# Altium PCB 李卓俊(1).PcbDoc
Units mil, origin at the board's own origin, x right, y up, seen from the top; angles counter-clockwise.
Board outline 4195.03 x 3903.03 mil, 2 copper layers (Top Layer, Bottom Layer); 77 components, 59 nets, 335 pads, 191 vias.
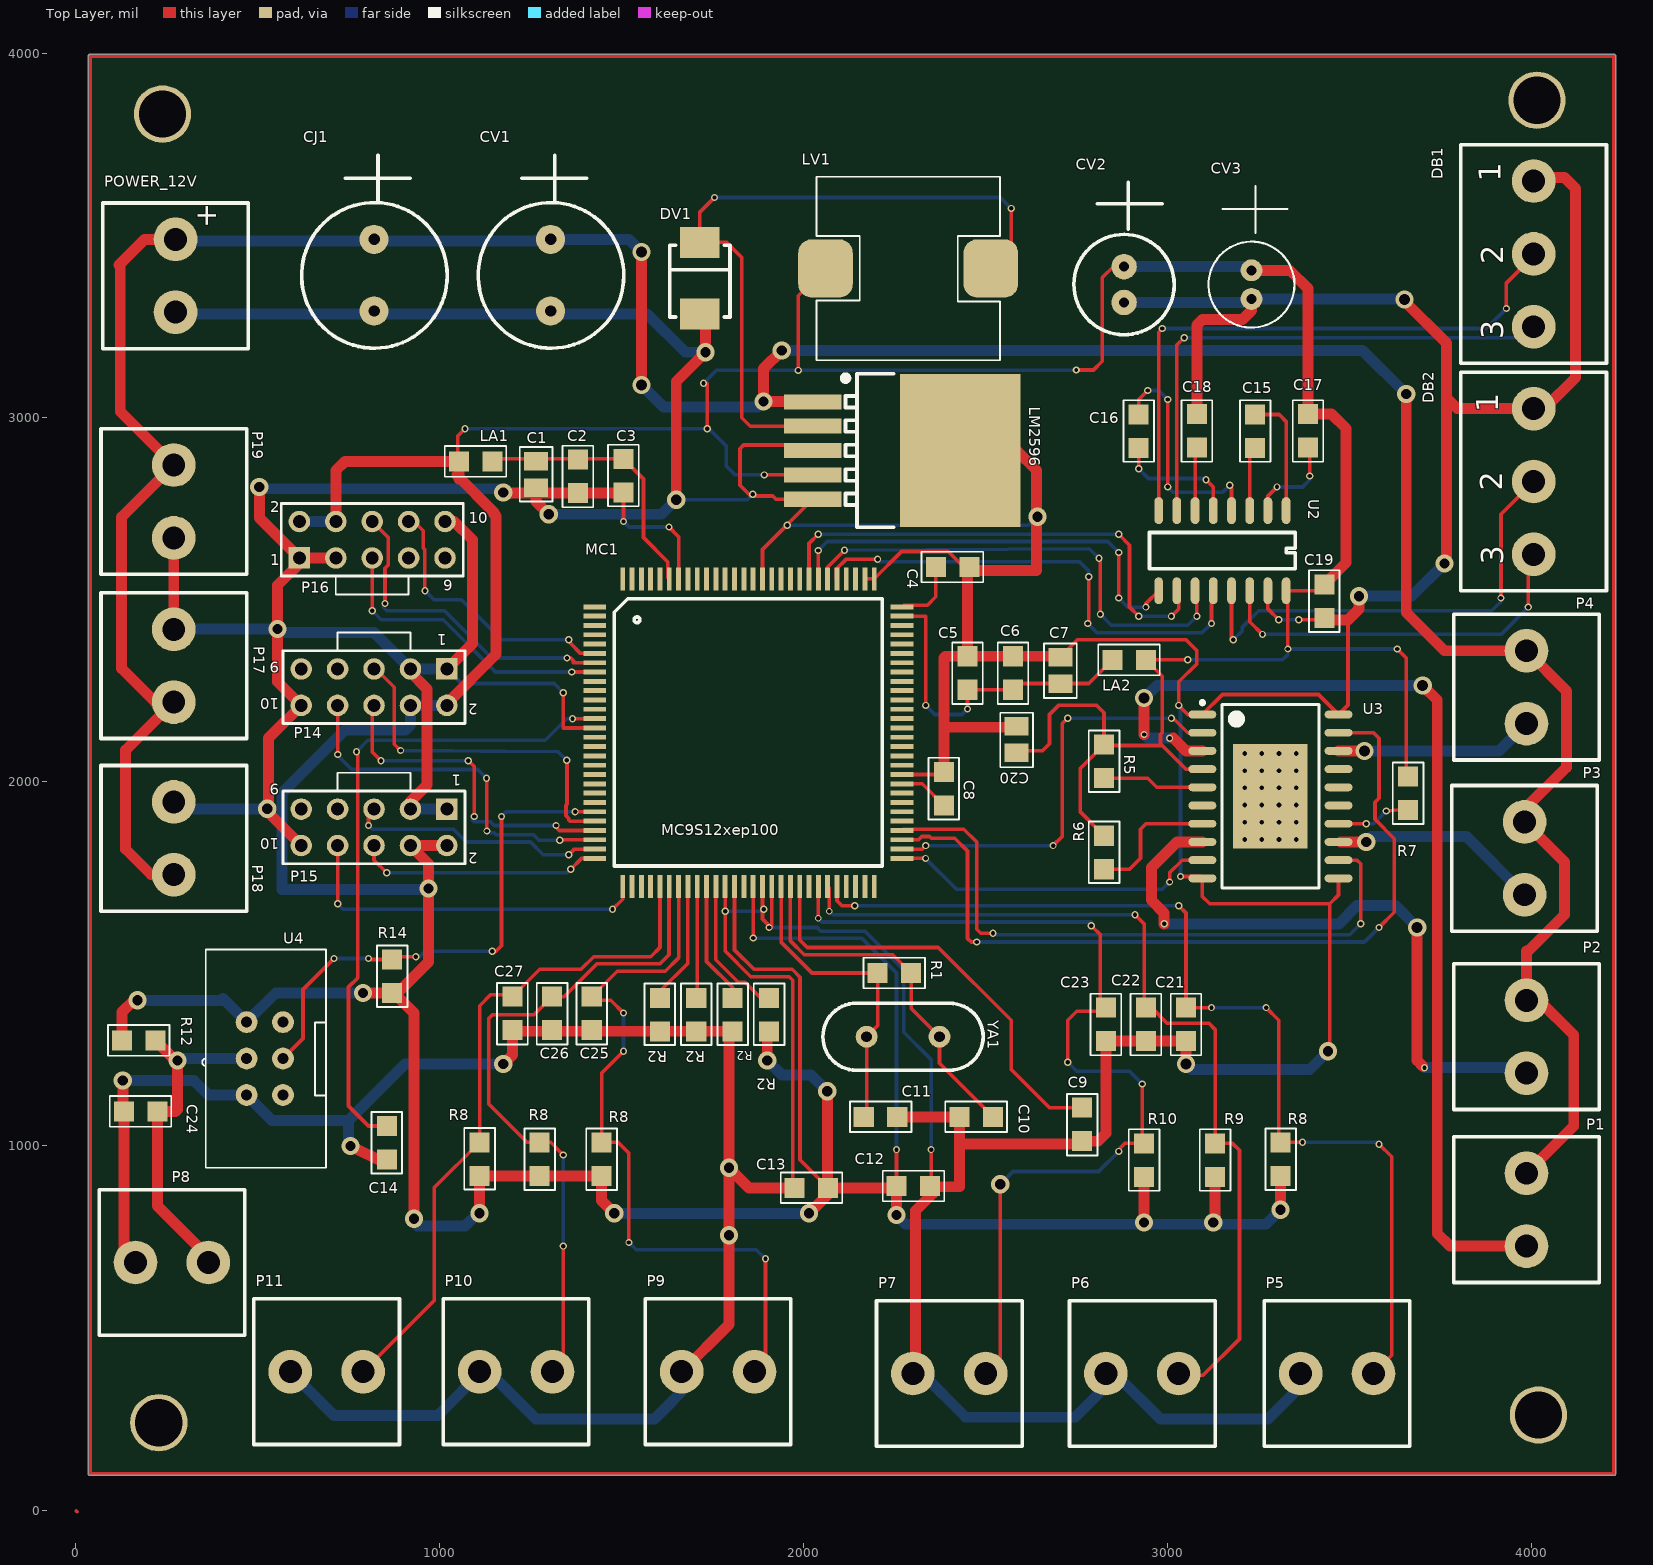
[diagram p0: Top Layer view]
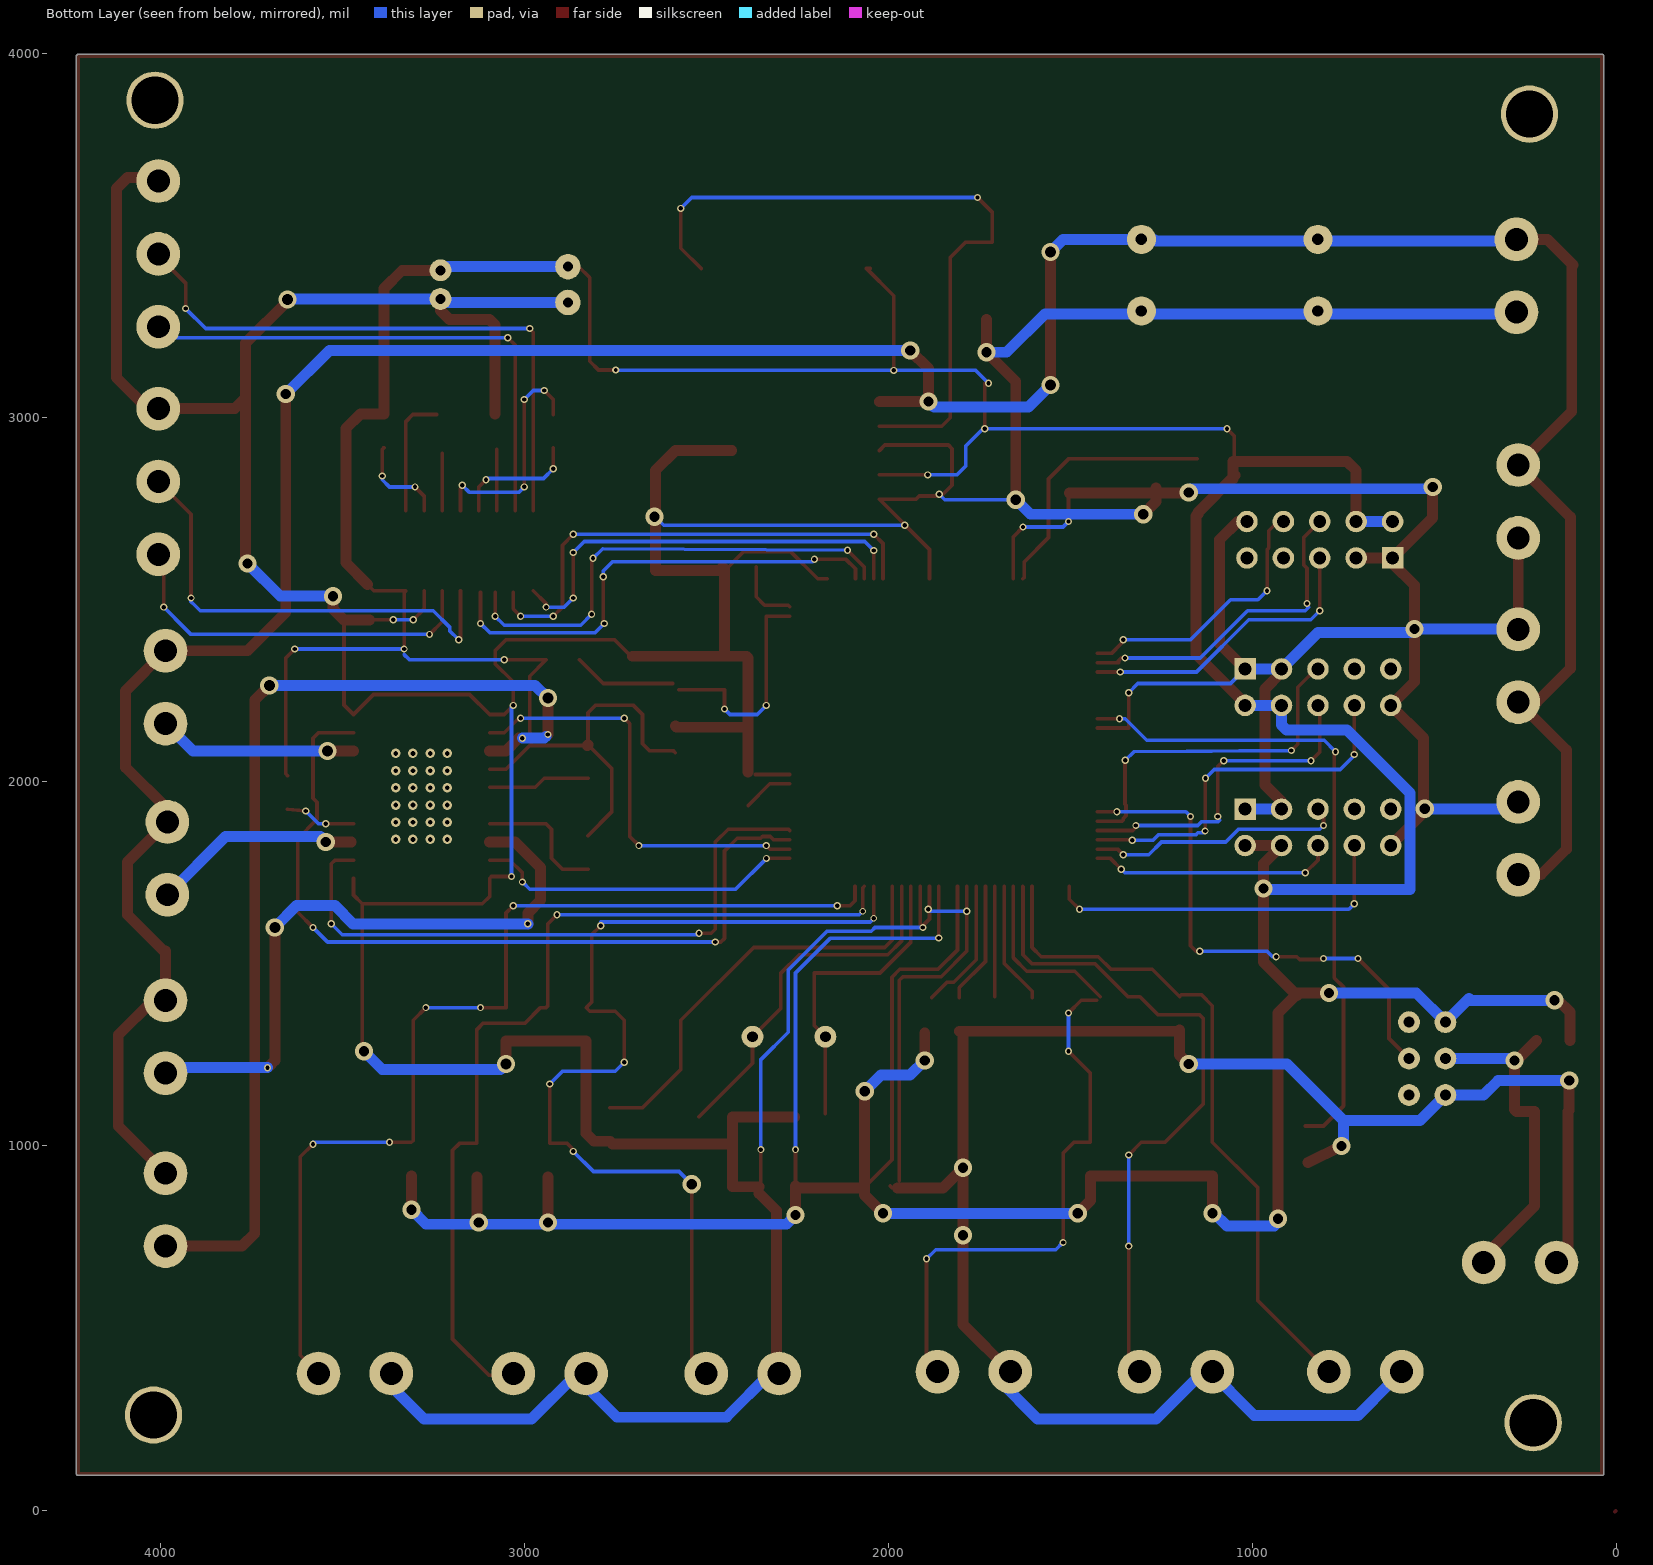
[diagram p1: Bottom Layer view, seen from below]

## Layer stack, top to bottom
Top Layer: signal copper 1.4
Dielectric: dielectric 12.6, FR-4, Dk 4.8
Bottom Layer: signal copper 1.4

## Board outline
34.98,100 ccw(c40,100) 40,94.98 4225,94.98 ccw(c4225,100) 4230.02,100 4230.02,3992 ccw(c4225,3992) 4229.99,3992.5 ccw(c4225,3993) 4230.02,3993 ccw(c4225,3993) 4225,3998.02 40,3998.02 ccw(c40,3993) 34.98,3993

## Design rules (kind name [scope] priority, off if disabled: settings)
Clearance [All] p1: gap=8
HoleSize [All] p1: absolutevalues=TRUE maxlimit=130 minlimit=1 maxpercent=80.000 minpercent=20.000
MinimumSolderMaskSliver [All] p1: minsoldermaskwidth=2
NetAntennae [All] p1: netantennaetolerance=8
PolygonConnect [All] p1: connectstyle=Relief reliefconductorwidth=10 reliefentries=4 polygonreliefangle="90 Angle"
RoutingVias [All] p1: holewidth=28 width=50 viastyle="Through Hole" minholewidth=28 minwidth=50 maxholewidth=28 maxwidth=50
ShortCircuit [All] p1: allowed=TRUE
SilkToSilkClearance [All] p1: silktosilkclearance=0
SilkscreenOverComponentPads [All] p1: minsilkscreentomaskgap=2
SolderMaskExpansion [All] p1: expansion=4
Width [All] p1: maxlimit=60 minlimit=10 preferedwidth=10
22 further rules are at their usual default settings.

## Classes and differential pairs
component class SHEET1-胡晓: C1 C2 C3 C4 C5 C6 C7 C8 C9 C10 C11 C12 C13 C14 C15 C16 C17 C18 C19 C20 C21 C22 C23 C24 C25 C26 C27 CJ1 CV1 CV2 CV3 DB1 DB2 DV1 LA1 LA2 LM2596 LV1 MC1 P1 P2 P3 P5 P6 P7 P8 P9 P10 P11 P14 P15 P16 P17 P18 P19 POWER_12V R1 R2 R5 R6 R7 R8 R9 R10 R12 R14 U2 U3 U4 YA1

## Components (designator, comment, footprint, x,y, rotation, side; value= is the part's Value field where it differs from the comment)
C1 "CA14" LC0805-有方向的电容 1265,2880 r270 top
C2 "CA13" 0805 1380,2885 r0 top
C3 "CA12" 0805 1505,2795 r180 top
C4 "CA11" 0805 2455,2590 r270 top
C5 "CA8" 0805 2450,2345 r0 top
C6 "CA9" 0805 2575,2345 r0 top
C7 "CA10" LC0805-有方向的电容 2705,2270 r90 top
C8 "CA7" 0805 2385,1935 r180 top
C9 "CA6" 0805 2765,1105 r0 top
C10 "CA5" 0805 2520,1080 r270 top
C11 "CA4" 0805 2165,1080 r90 top
C12 "CA3" 0805 2255,890 r90 top
C13 "CA2" 0805 1975,885 r90 top
C14 "CA1" 0805 855,1055 r0 top
C15 "104" 0805 3240,2917 r180 top
C16 "104" 0805 2920,2917 r180 top
C17 "104" 0805 3385,3010 r0 top
C18 "104" 0805 3080,3010 r0 top
C19 "104" 0805 3430,2450 r180 top
C20 "C20" LC0805-有方向的电容 2585,2080 r90 top
C21 "0.1uF" 0805 3050,1380 r0 top
C22 "0.1uF" 0805 2940,1380 r0 top
C23 "0.1uF" 0805 2830,1380 r0 top
C24 "Cap" 0805 225,1095 r270 top
C25 "0.1uF" 0805 1418,1410 r0 top
C26 "0.1uF" 0805 1309,1410 r0 top
C27 "0.1uF" 0805 1200,1410 r0 top
CJ1 "50V" 470uF 820,3490 r0 top
CV1 "Cap Pol1" 50V/330uF 1305,3490 r0 top
CV2 "Cap Pol1" 10V/330uF 2880,3415 r0 top
CV3 "Cap Pol1" 35V/10uF 3230,3405 r0 top
DB1 "DB1" kf128-3P 4005,3650 r270 top
DB2 "DB2" kf128-3P 4005,3025 r270 top
DV1 "Diode" SMB-二极管 1720,3480 r270 top
LA1 "LA2" 0805 1145,2880 r270 top
LA2 "LA1" 0805 2940,2335 r270 top
LM2596 "LM2596_5" LM2596 2430,2910 r180 top
LV1 "Inductor" 47uH 2060,3410 r0 top
MC1 "UA1" mc9s12xep100 1840,2145 r0 top
P1 "LED1" KF128-2p 3985,925 r270 top
P2 "LED2" KF128-2p 3985,1400 r270 top
P3 "LED3" KF128-2p 3980,1890 r270 top
P4 "蜂鸣器" KF128-2p 3985,2360 r270 top
P5 "按键" KF128-2p 3365,375 r0 top
P6 "按键" KF128-2p 2830,375 r0 top
P7 "按键" KF128-2p 2300,375 r0 top
P8 "复位开关" KF128-2p 365,680 r180 top
P9 "中断" KF128-2p 1665,380 r0 top
P10 "中断" KF128-2p 1110,380 r0 top
P11 "中断" KF128-2p 590,380 r0 top
P14 "Header 5X2" 插针5x5 1020,2310 r270 top
P15 "Header 5X2" 插针5x5 1020,1925 r270 top
P16 "Header 5X2" 插针5x5 615.01,2615 r90 top
P17 "12V供电" KF128-2p 270,2419 r270 top
P18 "12V供电" KF128-2p 270,1945 r270 top
P19 "12V供电" KF128-2p 270,2670 r90 top
POWER_12V "Header 2" KF128-2p 275,3290 r90 top
R1 "RA8" 0805 2295,1475 r270 top
R2 "RA2" 0805 1905,1315 r180 top
R2 "RA2" 0805 1705,1315 r180 top
R2 "RA2" 0805 1605,1315 r180 top
R2 "RA2" 0805 1805,1315 r180 top
R5 "10K" 0805 2825,2010 r180 top
R6 "10K" 0805 2825,1760 r180 top
R7 "10K" 0805 3660,2015 r0 top
R8 "10K" 0805 1110,918 r180 top
R8 "10K" 0805 1445,1010 r0 top
R8 "10K" 0805 3310,1010 r0 top
R8 "10K" 0805 1275,1010 r0 top
R9 "10K" 0805 3130,915 r180 top
R10 "10K" 0805 2935,915 r180 top
R12 "Res2" 0805 220,1290 r270 top
R14 "Res2" 0805 870,1420 r180 top
U2 "MAX3232C" MAX232 3325,2745 r0 top
U3 "TLE8104" TEL8104 3095,2185 r0 top
U4 "BDM" BDM 570,1140 r270 top
YA1 "YA1" XTAL 2145,1300 r0 top

## Footprints (in the part's own frame and the unit in brackets; to place one, negate y for a bottom-side part, rotate by r counter-clockwise, add the part's x,y. Pads: shape width x height; smd on the part's side, far side on the other; paste and mask are expansions set on the pad)
10V/330uF [mil]
  round 70 hole 27.56: 1(0,0) 2(0,-98.43)
  silkscreen extent -138,-187 138,231
35V/10uF [mil]
  round 60 hole 27.56: 1(0,0) 2(0,-78.74)
  silkscreen extent -118,-157 118,231
47uH [mil]
  rrect50% 150x160.48 smd mask+0: 0(0,0) 1(454.09,0)
  silkscreen extent -25,-252 479,252
50V/330uF [mil]
  round 80 hole 31.5: 1(0,0) 2(0,-196.85)
  silkscreen extent -199,-299 201,231
470uF [mil]
  round 80 hole 31.5: 1(0,0) 2(0,-196.85)
  silkscreen extent -199,-299 201,231
0805 [mil]
  rect 55x55 smd: 1(0,-92) 2(0,0)
  silkscreen extent -42,-131 42,38
BDM [mil]
  round 60 hole 30: 1(0,0) 2(0,-100) 3(-100,0) 4(-100,-100) 5(-200,0) 6(-200,-100)
  silkscreen extent -400,-222 200,118
KF128-2p [mil]
  round 120 hole 62.99: 1(0,0) 2(200,0)
  silkscreen extent -100,-200 300,200
kf128-3P [mil]
  round 120 hole 62.99: 0(400,0) 1(0,0) 2(200,0)
  silkscreen extent -100,-200 500,200
LC0805-有方向的电容 [mm]
  rect 1.287x1.673 smd: 1(0,0) 2(1.85,0)
  silkscreen extent -1.02,-1.14 2.79,1.14
LM2596 [mm]
  rect 4x1.05 smd: 1(10.3,-3.4) 2(10.3,-1.7) 3(10.3,0) 4(10.3,1.7) 5(10.3,3.4)
  rect 8.4x10.65 smd: 6(0,0)
  silkscreen extent 4.65,-5.35 8.2,5.35
MAX232 [mil]
  oval 24x74 smd: 1(0,0) 2(-50,0) 3(-100,0) 4(-150,0) 5(-200,0) 6(-250,0) 7(-300,0) 8(-350,0) 9(-350,-220) 10(-300,-220) 11(-250,-220) 12(-200,-220) 13(-150,-220) 14(-100,-220) 15(-50,-220) 16(0,-220)
  silkscreen extent -375,-160 25,-60
mc9s12xep100 [mm]
  rect 1.6x0.34 smd: 1(-10.511,8.528) 2(-10.511,7.878) 3(-10.511,7.228) 4(-10.511,6.578) 5(-10.511,5.928) 6(-10.511,5.278) 7(-10.511,4.628) 8(-10.511,3.978) 9(-10.511,3.328) 10(-10.511,2.678) 11(-10.511,2.028) 12(-10.511,1.378) 13(-10.511,0.728) 14(-10.511,0.078) 15(-10.511,-0.572) 16(-10.511,-1.222) 17(-10.511,-1.872) 18(-10.511,-2.522) 19(-10.511,-3.172) 20(-10.511,-3.822) 21(-10.511,-4.472) 22(-10.511,-5.122) 23(-10.511,-5.772) 24(-10.511,-6.422) 25(-10.511,-7.072) 26(-10.511,-7.722) 27(-10.511,-8.372) 28(-10.511,-9.022) 57(10.939,-9.022) 58(10.939,-8.372) 59(10.939,-7.722) 60(10.939,-7.072) 61(10.939,-6.422) 62(10.939,-5.772) 63(10.939,-5.122) 64(10.939,-4.472) 65(10.939,-3.822) 66(10.939,-3.172) 67(10.939,-2.522) 68(10.939,-1.872) 69(10.939,-1.222) 70(10.939,-0.572) 71(10.939,0.078) 72(10.939,0.728) 73(10.939,1.378) 74(10.939,2.028) 75(10.939,2.678) 76(10.939,3.328) 77(10.939,3.978) 78(10.939,4.628) 79(10.939,5.278) 80(10.939,5.928) 81(10.939,6.578) 82(10.939,7.228) 83(10.939,7.878) 84(10.939,8.528)
  rect 0.34x1.6 smd: 29(-8.561,-10.972) 30(-7.911,-10.972) 31(-7.261,-10.972) 32(-6.611,-10.972) 33(-5.961,-10.972) 34(-5.311,-10.972) 35(-4.661,-10.972) 36(-4.011,-10.972) 37(-3.361,-10.972) 38(-2.711,-10.972) 39(-2.061,-10.972) 40(-1.411,-10.972) 41(-0.761,-10.972) 42(-0.111,-10.972) 43(0.539,-10.972) 44(1.189,-10.972) 45(1.839,-10.972) 46(2.489,-10.972) 47(3.139,-10.972) 48(3.789,-10.972) 49(4.439,-10.972) 50(5.089,-10.972) 51(5.739,-10.972) 52(6.389,-10.972) 53(7.039,-10.972) 54(7.689,-10.972) 55(8.339,-10.972) 56(8.989,-10.972) 85(8.989,10.478) 86(8.339,10.478) 87(7.689,10.478) 88(7.039,10.478) 89(6.389,10.478) 90(5.739,10.478) 91(5.089,10.478) 92(4.439,10.478) 93(3.789,10.478) 94(3.139,10.478) 95(2.489,10.478) 96(1.839,10.478) 97(1.189,10.478) 98(0.539,10.478) 99(-0.111,10.478) 100(-0.761,10.478) 101(-1.411,10.478) 102(-2.061,10.478) 103(-2.711,10.478) 104(-3.361,10.478) 105(-4.011,10.478) 106(-4.661,10.478) 107(-5.311,10.478) 108(-5.961,10.478) 109(-6.611,10.478) 110(-7.261,10.478) 111(-7.911,10.478) 112(-8.561,10.478)
  silkscreen extent -9.14,-9.55 9.55,9.09
SMB-二极管 [mil]
  rect 85x107.99 smd: 1(195,-5) 2(-1.85,-5)
  silkscreen extent 6,-88 203,78
TEL8104 [mm]
  oval 1.95x0.55 smd: 1(0,0) 2(0,-1.27) 3(0,-2.54) 4(0,-3.81) 5(0,-5.08) 6(0,-6.35) 7(0,-7.62) 8(0,-8.89) 9(0,-10.16) 10(0,-11.43) 11(9.5,-11.43) 12(9.5,-10.16) 13(9.5,-8.89) 14(9.5,-7.62) 15(9.5,-6.35) 16(9.5,-5.08) 17(9.5,-3.81) 18(9.5,-2.54) 19(9.5,-1.27) 20(9.5,0)
  rect 5.2x7.3 smd: 21(4.75,-5.715)
  silkscreen extent -0.12,-12.11 8.13,0.95, body extent 0.95,-12.11 8.55,0.68, height 2.55
XTAL [mil]
  round 60 hole 30: 1(28,0) 2(228,0)
  silkscreen extent -92,-92 348,92
插针5x5 [mm]
  rect 1.5x1.5 hole 0.9: 1(0,0)
  round 1.5 hole 0.9: 2(2.54,0) 3(0,-2.54) 4(2.54,-2.54) 5(0,-5.08) 6(2.54,-5.08) 7(0,-7.62) 8(2.54,-7.62) 9(0,-10.16) 10(2.54,-10.16)
  silkscreen extent -2.54,-11.43 3.81,1.27

## Free pads (board coordinates)
  round 157.48 hole 129.92: 1(229,240) 1(239,3834) 1(4014,3872) 1(4018,261)

## Via types
v1: diameter 20, hole 12, Top Layer to Bottom Layer, 120 vias
v2: diameter 50, hole 28, Top Layer to Bottom Layer, 35 vias
v3: diameter 25.98, hole 12.99, Top Layer to Bottom Layer, tented top, 24 vias
v4: diameter 50, hole 30, Top Layer to Bottom Layer, 8 vias
v5: diameter 18, hole 12, Top Layer to Bottom Layer, 2 vias
v6: diameter 20, hole 10, Top Layer to Bottom Layer, 1 vias
v7: diameter 20, hole 12, Top Layer to Bottom Layer, tented top, 1 vias

## Nets (pads, with @x,y where several pads share a name; then routed paths per layer and width w, separated by ;. In a path a pad name is that pad's centre, name@x,y a point inside that pad or via, vN(x,y) a via of type N, cw(c..) or ccw(c..) an arc to the next point about the centre after c; other vN are vias at no path point)
5V: C12.2 C13.1 C17.2 C19.1 C20.1 CV2.1 CV3.1 LA1.1 LA2.2 LM2596.4 LV1.0 MC1.41 MC1.43 P14.2 P14.4 P15.2 P15.4 P16.2 P16.4 R2.2@1905,1315 R5.1 R6.1 R7.2 R8.1@1275,918 R8.1@1445,918 R8.1@3310,918 R8.2@1110,918 R9.2 R10.2 R12.1 R14.2 U2.16 U3.4 U4.6 | length 17574.9
  Top Layer w10: LA1.1@1050,2883 1050,2950 v1(1070,2970) ; v1(1735,2970) 1735,3095 ; MC1.41 1810.02,1538.26 1863.28,1485 1968.28,1485 1990,1463.28 1990,962 2065,887 C13.1 ; v1(1861.21,1571.21) MC1.43 ; v1(1891.93,2843.07) LM2596.4 ; R2.2@1900,1310 R2.2@1905,1315 ; v1(1985,3130) 1985,3335 LV1.0 LV1.0@2050,3410 ; C12.2 v1(2255,990) ; C20.1 2590,2085 2655,2085 2675,2105 2675,2185 2700,2210 2805,2210 2825,2190 R5.1 2760,2037 2760,1917 R6.1 ; v6(2749,3131) 2796,3131 2820,3155 2820,3385 2850,3415 CV2.1 ; R5.1@2827,2100 2985,2100 ; v1(3055,2335) LA2.2 2985,2290 2985,2135.36 2980,2130.36 2980,2105 2985,2100 ; U3.4 3050,2035 2985,2100 ; v1(3330,2365) 3330,2520 U2.16 3413,2525 C19.1 ; v1(3630,2365) 3655,2340 3655,2022 R7.2@3650,2017
  Top Layer w30: R12.1 128,1368 160,1400 v2(170,1400) ; P16.4 715.01,2855.01 740,2880 LA1.1 1053,2832 ; v2(790,1420) R14.2 875,1420 930,1365 v2(930,800) ; R14.2@877.25,1412.75 970,1505.5 970,1775 P15.4 P15.2 ; P15.4@911.06,1833.94 P15.4@920,1833.94 ; P14.2 1020,2215.59 1155,2350.59 1155,2730 1150,2735 1150,2740 1048,2842 ; v2(1110,815) 1110,918 1275,918 1445,918 1445,850 v2(1480,815) ; v2(1900,1235) R2.2@1900,1310 ; v2(2015,815) 2065,865 2065,887 v2(2065,1150) ; C13.1 C12.2@2250,885 ; v2(2255,810) C12.2 ; R5.1 R5.1@2827,2100 ; v2(2935,790) R10.2 ; v2(3125,790) 3130,795 R9.2 ; CV3.1 3335,3405 3385,3355 C17.2 3450,3010 3490,2970 3490,2602 C19.1 ; v2(3310,825) R8.1@3310,918
  Bottom Layer w10: v1(1070,2970) v1(1735,2970) 1740,2970 1786.93,2923.07 1786.93,2868.07 1811.93,2843.07 v1(1891.93,2843.07) ; v1(1725,3095) 1760,3130 v1(1985,3130) 2748,3130 v6(2749,3131) ; v1(1861.21,1571.21) 1862.41,1570 2160,1570 2255,1475 v1(2255,990) ; v1(3055,2335) 3315,2335 3330,2350 ; v1(3330,2365) v1(3630,2365)
  Bottom Layer w30: v2(170,1400) 405,1400 ; 405,1405 U4.6 550,1420 v2(790,1420) ; P16.2 P16.4 ; v2@930,790 940,780 1070,780 v2@1105,815 ; v2@970,1704.47 567.47,1704.47 567.47,1969.14 740.33,2142 906,2142 920,2156 P14.4 P14.2 ; v2(1480,815) v2(2015,815) ; v2(1900,1235) 1940,1195 2020,1195 v2(2065,1150) ; v2(2255,810) 2280,785 3270,785 v2(3310,825) ; CV2.1 CV3.1@3220,3415
  other v2: 970,1707
12V: CJ1.1 CV1.1 LM2596.1 P1.1 P2.1 P3.1 P4.1 P17.2 P18.2 P19.2 POWER_12V.2 | length 8990
  Top Layer w30: P18.2 208,1745 138,1815 138,2087 P17.2 219,2219 127,2311 127,2727 P19.2 123,3017 123,3417 120,3420 190,3490 POWER_12V.2 ; v4(1555,3090) v4(1555,3455) ; v2(1940,3185) 1890,3135 v2(1890,3045) 2023.35,3045 LM2596.1 ; v2(3655,3065) 3655,2465 3760,2360 P4.1 4095,2250 4095,2040 3980,1925 P3.1 4090,1780 4090,1635 3990,1535 3985,1535 P2.1 ; P1.1 4115,1055 4115,1305 P2.1@4020,1400
  Bottom Layer w30: POWER_12V.2@275,3485 1265,3485 1270,3490 1520,3490 v4(1555,3455) ; v4(1555,3090) 1615,3030 1875,3030 v2(1890,3045) ; v2(1940,3185) 3535,3185 v2(3655,3065)
BKGD: MC1.23 R14.1 U4.3 | length 1408.2
  Top Layer w10: U4.3 625,1295 625,1430 v1(710,1515) ; v1@812,1512 R14.1 878,1520 v1(935,1520) ; 1155,1535 1170,1550 v1(1170,1905) ; v1(1372.24,1917.76) MC1.23
  Bottom Layer w10: v1(710,1515) v1(805,1515) ; v1(935,1520) 945,1520 960,1535 v1(1145,1535) ; v1(1170,1905) 1182.76,1917.76 v1(1372.24,1917.76)
GND: C1.2 C2.1 C3.2 C4.2 C5.2 C6.2 C7.2 C8.1 C9.1 C10.1 C11.1 C12.1 C13.2 C14.1 C18.2 C19.2 C20.2 C21.1 C22.1 C23.1 C24.1 C25.1 C26.1 C27.1 CJ1.2 CV1.2 CV2.2 CV3.2 DB1.1 DB2.1 DV1.1 LM2596.3 LM2596.5 LM2596.6 MC1.14 MC1.40 MC1.44 MC1.45 MC1.66 MC1.85 MC1.86 MC1.97 MC1.106 P5.1 P6.1 P7.1 P8.2 P9.1 P10.1 P11.1 P14.1 P14.3 P14.10 P15.1 P15.3 P15.10 P16.1 P16.3 P16.10 P17.1 P18.1 P19.1 POWER_12V.1 R2.2@1605,1315 R2.2@1705,1315 R2.2@1805,1315 U2.15 U3.1 U3.10 U3.11 U3.20 U4.2 | length 29222.7
  Top Layer w10: v1(1340,2245) 1340,2148.07 MC1.14 ; v1(1505,2715) C3.2 ; v1(1630,2700) 1656.48,2673.52 MC1.106 ; MC1.40 1784.43,1535.57 1855,1465 1960,1465 1970,1455 C13.2@1970,905 ; MC1.44 1886.8,1623.2 1910,1600 1912.39,1602.39 MC1.45 ; MC1.97 1886.8,2638.45 LM2596.5 1923.86,2776.14 1915,2785 1855,2785 1825,2815 1825,2915 1835,2925 2009.49,2925 LM2596.3 ; C13.2@1990,885 C13.2@1995,890 ; MC1.86 MC1.85 2268.86,2632.5 2396.71,2632.5 2449.21,2580 C4.2@2450,2580 ; MC1.66 C8.1@2364.88,2020.12 ; C12.1@2350,893 v1(2350,990) ; C7.2 2752.17,2390 3050,2390 3080,2360 3080,2324.64 3030,2274.64 v1(3030,2210) 3055,2185 U3.1 3150,2240 3414.02,2240 U3.20 3495,2210.98 3495,2445 ; v1(3035,1740) 3090,1740 U3.10 3095,1685 3115,1665 3445,1665 ; U2.15 3275,2475 v1(3305,2445) ; v1(3360,2445) 3425,2445 C19.2 ; v2@3445,1260 3445,1665 ; U3.11 3469.02,1689.02 3445,1665
  Top Layer w30: v2(130,1180) 130,1098 C24.1 133,712 160,685 P8.2@175,685 ; P17.1 P19.1 ; v2(505,2810) 505,2725.01 P16.1 ; P15.10 530,1915 530,2120 P14.10 555,2275 v2(555,2420) 555,2540 615.01,2600.01 P16.1 ; P16.3 P16.1 ; v2(755,1000) C14.1@847,955 ; P15.3 920,1945.55 965.53,1991.07 965.53,2255.53 920,2301.06 P14.3 ; P16.10 1040,2715 1090,2665 1090,2380 P14.1 ; v2(1175,1225) 1200,1250 C27.1 ; v2@1185,2795 1187,2793 C1.2@1265,2793 ; C27.1@1203,1315 1605,1315 1705,1315 R2.2@1805,1315 ; C1.2 C1.2@1265,2793 ; v2(1300,2735) 1265,2770 C1.2@1265,2793 ; C3.2@1503,2793 C2.1 C1.2@1265,2793 ; v2(1650,2775) 1650,3100 v2(1730,3180) DV1.1@1730,3270 ; P9.1 1795,510 v2@1795,750 ; v2(1795,755) v2(1795,940) ; R2.2@1795,1305 v2(1795,940) ; C13.2 1850,885 v2(1795,940) ; C11.1 C10.1 2428,1005 ; P7.1@2307,380 2307,822 C12.1@2355,870 ; C12.1@2355,888 2428,888 2428,1005 ; C8.1 2385,2340 2390,2345 C5.2 ; 2390,2150 2582.17,2150 C20.2 ; LM2596.6 2585,2910 2640,2855 2640,2728 2640,2580 C4.2@2450,2580 ; C4.2 2450,2585 C4.2@2450,2580 ; C7.2@2702.83,2345 C6.2 C5.2 ; C9.1@2757,1005 2428,1005 ; C9.1 2808,1013 2830,1035 C23.1 C22.1 C21.1 v4(3050,1225) ; C18.2 3080,3255 3095,3270 3205,3270 3230,3295 CV3.2 ; C19.2@3425,2445 3495,2445 3525,2475 v2(3525,2510) ; v4@3646.87,3323.13 3765,3205 3765,3055 ; v2@3765,2600 3765,3055 ; DB1.1@4020,3660 4090,3660 4120,3630 4120,3110 4035,3025 DB2.1 3795,3025 3765,3055 ; C5.2 C4.2@2450,2580
  Bottom Layer w10: P18.1 P18.1@289,1926 ; P14.1 1060,2270 1315,2270 v1(1340,2245) ; v1(1505,2715) 1520,2700 v1(1630,2700) ; v2(1650,2775) 1845,2775 v1(1860,2790) ; v1(1785,1645) 1885,1645 v1(1890,1650) ; v1(1905,1600) 2036.72,1600 2046.72,1590 2168.28,1590 2275,1483.28 2275,1312.36 2350,1237.36 v1(2350,990) ; v1(1955,2705) 2617,2705 v2@2640,2728 ; v1(3030,2210) 3035,2205 v1(3035,1740) ; CV3.2@3220.31,3316.57 CV3.2 ; v1(3305,2445) v1(3360,2445)
  Bottom Layer w30: v2(130,1180) 325,1180 365,1140 U4.2 540,1070 750,1070 ; P17.1 271,2420 v2(555,2420) 565,2410 820,2410 P14.3 P14.1 ; POWER_12V.1@280,3285 1570,3285 1675,3180 v2@1710,3180 ; P18.1@289,1926 v2(527,1926) ; v2@500,2805 v2@1170,2805 ; P11.1@620,375 620,350 710,260 995,260 1125,390 1265,250 1590,250 1695,355 P9.1@1695,375 ; v2@750,1010 750,1070 ; P15.3 P15.1 ; v2(1175,1225) 905,1225 750,1070 ; v2(1300,2735) 1610,2735 v2(1650,2775) ; P7.1 2325,375 2445,255 2745,255 2860,370 2980,250 3275,250 P5.1@3395,370 ; CV2.2 CV3.2@3220.31,3316.57 ; v4(3050,1225) 3065,1210 3390,1210 v2(3440,1260) ; CV3.2 v4@3650,3326.26 ; v2(3525,2510) 3670,2510 v2(3760,2600)
  other v2: 2642,2728 1175,2795
  other v4: 3650,3325
KWH0: C21.2 MC1.52 P5.2 R8.2@3310,1010 | length 2806.6
  Top Layer w10: MC1.52 2091.52,1673.48 2105,1660 v1(2140,1660) ; v1(3030,1660) 3050,1640 C21.2 v1(3120,1380) ; v1(3270,1380) 3305,1345 R8.2@3305,1015 ; R8.2@3310,1010 v1(3370,1010) ; P5.2 3615,425 3615,970 v1(3580,1005)
  Bottom Layer w10: v1(2140,1660) v1(3030,1660) ; v1(3120,1380) v1(3270,1380) ; v1(3370,1010) v1@3580,1010
KWH1: C22.2 MC1.51 P6.2 R9.1 | length 2480.4
  Top Layer w10: MC1.51 2069.83,1709.13 2069.83,1675.15 2070,1674.98 v5(2070,1645) ; v1(2910,1635) 2935,1610 2935,1385 C22.2 2955,1380 2997.5,1337.5 3112.5,1337.5 3130,1320 R9.1 3178,1007 3197,988 3197,470 3097,370 P6.2@3060,370
  Bottom Layer w10: v5(2070,1645) 2080,1635 v1(2910,1635)
KWH2: C23.2 MC1.50 P7.2 R10.1 | length 2648.8
  Top Layer w10: MC1.50@2040,1712.69 MC1.50 v5@2040.34,1630 ; P7.2@2540,380 v2(2540,895) ; v1(2725,1230) 2725,1345 2750,1370 2820,1370 C23.2 2815,1395 2815,1580 v1(2790,1605) ; 2870,995 2882,1007 2930,1007 v1(2930,1170)
  Bottom Layer w10: v5(2040,1625) 2050,1615 2790,1615 ; v2(2540,895) 2575,930 2810,930 v1(2865,985) ; v1(2725,1230) 2750,1205 2895,1205 v1(2930,1170)
KWH4: C25.2 MC1.35 P9.2 R8.2@1445,1010 | length 1996.6
  Top Layer w10: C25.2 1488,1480 1620,1480 1656.48,1516.48 MC1.35 ; C25.2@1428,1400 1470,1400 v1(1505,1365) ; v1(1505,1260) 1445,1200 1445,1010 1490,1010 1520,980 v1(1520,735) ; P9.2@1895,370 1895,375 v1(1895,690)
  Bottom Layer w10: v1(1505,1260) v1(1505,1365) ; v1(1520,735) 1540,715 1870,715 v1(1895,690)
KWH5: C26.2 MC1.34 P10.2 R8.2@1275,1010 | length 1853.9
  Top Layer w10: P10.2@1340,375 v1(1340,725) ; v1(1340,975) 1305,1010 1275,1010 1240,1010 1135,1115 1135,1350 1145.5,1360.5 1259.5,1360.5 C26.2 1341.79,1410 1431.79,1500 1605,1500 1630,1525 1630,1712.14 MC1.34
  Bottom Layer w10: v1(1340,725) v1(1340,975)
KWH6: C27.2 MC1.33 P11.2 R8.1@1110,1010 | length 1828.7
  Top Layer w10: P11.2@815,405 985,575 985,885 1110,1010 1110,1385 1140,1415 C27.2@1195,1415 ; C27.2 1275,1485 1388.5,1485 1423.5,1520 1580,1520 1605.3,1545.3 MC1.33
NetC1_1: C1.1 C2.2 C3.1 LA1.2 MC1.107 | length 734.6
  Top Layer w10: LA1.2@1152,2887 C3.1 1560,2832 1560,2671.01 1626.99,2604.02 1626.99,2561.42 MC1.107
NetC4_1: C4.1 MC1.84 | length 185.5
  Top Layer w10: MC1.84 2274.91,2485 2339.84,2485 2363,2508.16 C4.1
NetC5_1: C5.1 C6.1 C7.1 LA2.1 MC1.83 | length 902
  Top Layer w10: MC1.83 2335,2455.16 v1(2335,2210) ; v1(2450,2200) C5.1 C6.1 ; C6.1@2592,2270 C7.1 2783,2270 LA2.1
  Bottom Layer w10: v1(2335,2210) 2360,2185 2435,2185 v1(2450,2200)
NetC8_2: C8.2 MC1.65 | length 139
  Top Layer w10: MC1.65 2325.47,1994.53 C8.2
NetC9_2: C9.2 MC1.48 | length 1193
  Top Layer w10: MC1.48 1989.16,1565.84 2010,1545 2370,1545 2570,1345 2570,1210 2675,1105 C9.2
NetC10_2: C10.2 MC1.47 R1.2 YA1.2 | length 1006.3
  Top Layer w10: MC1.47 1963.57,1562.69 2001.26,1525 2245,1525 R1.2 2295,1378 YA1.2 2373,1227 C10.2
NetC11_2: C11.2 MC1.46 R1.1 YA1.1 | length 852.7
  Top Layer w10: MC1.46 1937.98,1560 2022.98,1475 R1.1 2203,1330 YA1.1 C11.2@2173,1088
NetC14_2: C14.2 MC1.13 | length 1802.9
  Top Layer w10: v1@775,2083 775,1461.57 750,1436.57 750,1110 805,1055 C14.2 ; v1(1365,2173.66) MC1.13
  Bottom Layer w10: v1(772,2083) 803,2114 1290,2114 1349.66,2173.66 v1(1365,2173.66)
NetC15_1: C15.1 U2.1 | length 337.9
  Top Layer w10: C15.1 3306,3009 3325,2990 U2.1
NetC15_2: C15.2 U2.3 | length 157
  Top Layer w10: U2.3 C15.2@3225,2902
NetC16_1: C16.1 U2.4 | length 626.2
  Top Layer w10: C16.1 2920,3050 v1(2945,3075) ; v1(3000,2810) v1(3000,3050) ; U2.4 3175,2805
  Bottom Layer w10: v1(2945,3075) 2975,3075 v1(3000,3050) ; v1(3000,2810) 3015,2795 3124.64,2795 3150,2795 v1(3170,2815)
NetC16_2: C16.2 U2.5 | length 346.5
  Top Layer w10: v1(2920,2860) C16.2 ; v1(3105,2830) 3125,2810 U2.5
  Bottom Layer w10: v1(2920,2860) 2947,2833 v1@3105,2833
NetC17_1: C17.1 U2.2 | length 263.7
  Top Layer w10: U2.2 3275,2785 v1(3300,2810) ; C17.1 3390,2913 v1(3390,2840)
  Bottom Layer w10: v1(3300,2810) 3370,2810 3390,2830 v1(3390,2840)
NetC18_1: C18.1 U2.6 | length 168
  Top Layer w10: U2.6 C18.1@3075,2913
NetDB1_22: DB1.0 U2.7 | length 1503.6
  Top Layer w10: U2.7 3025,3200 v1(3045,3220)
  Bottom Layer w10: v1(3045,3220) DB1.0@4030,3220 ; DB1.0@3995,3235 DB1.0@4020,3260
NetDB1_23: DB1.2 U2.8 | length 1669.2
  Top Layer w10: U2.8 2975,3235 v1(2985,3245) ; v1(3930,3300) 3930,3370 DB1.2@4020,3460
  Bottom Layer w10: v1(2985,3245) 3875,3245 v1(3930,3300)
NetDB2_22: DB2.2 U2.13 | length 1278.9
  Top Layer w10: U2.13 3175,2395 v1(3180,2390) ; v1(3915,2505) 3915,2735 DB2.2
  Bottom Layer w10: v1(3180,2390) 3205,2415 3205,2425.36 3249.64,2470 3890,2470 3905,2485 3915,2495
NetDB2_23: DB2.0 U2.14 | length 1046.8
  Top Layer w10: U2.14 3225,2440 v1(3260,2405) ; v1(3990,2480) 3990,2610 DB2.0
  Bottom Layer w10: v1(3260,2405) 3915,2405 3930,2420 v1(3990,2480)
NetDV1_2: DV1.2 LM2596.2 LV1.1 | length 1931.7
  Top Layer w10: v1(1755,3605) 1715,3565 DV1.2 1788.15,3481.85 1830,3440 1830,3000 1853.07,2976.93 LM2596.2 ; LV1.1 2570,3465.91 v1(2570,3575)
  Bottom Layer w10: v1(1755,3605) 2540,3605 v1(2570,3575)
NetMC1_36: MC1.36 R2.1@1605,1407 | length 338
  Top Layer w10: R2.1@1605,1407 1605,1425 1682.07,1502.07 MC1.36
NetMC1_37: MC1.37 R2.1@1705,1407 | length 303.4
  Top Layer w10: R2.1@1707.66,1409.66 MC1.37
NetMC1_38: MC1.38 R2.1@1805,1407 | length 335.7
  Top Layer w10: MC1.38 1733.25,1506.75 1805,1435 R2.1@1805,1407
NetMC1_39: MC1.39 R2.1@1905,1407 | length 367.4
  Top Layer w10: MC1.39 1758.84,1511.16 1820.5,1449.5 1838.71,1449.5 R2.1@1881.21,1407
NetR5_2: R5.2 U3.5 | length 280.4
  Top Layer w10: R5.2 2945,2010 2970,1985 U3.5
NetR6_2: R6.2 U3.7 | length 368.6
  Top Layer w10: R6.2 2895,1760 2925,1790 2925,1870 2940,1885 U3.7
NetR7_1: R7.1 U3.14 | length 195.7
  Top Layer w10: U3.14 v1(3545,1885) ; v1(3600,1920) R7.1@3650,1925
  Bottom Layer w10: v1(3545,1885) 3565,1885 v1(3600,1920)
OUT1: P1.2 U3.3 | length 2874.6
  Top Layer w10: v1(3005,2120) 3015,2120
  Top Layer w30: v1(2935,2130) v4(2935,2230) ; 3015,2120 3050,2085 U3.3 ; v4(3700,2265) 3740,2225 3740,760 3775,725 P1.2
  Bottom Layer w10: P1.2@3955,695 P1.2
  Bottom Layer w30: v4(2935,2230) 2970,2265 v4(3700,2265) ; v1@2940,2125 2945,2120 v1(3005,2120)
OUT2: P2.2 U3.8 | length 1751.5
  Top Layer w30: v1(2990,1610) 2990,1640 2955,1675 2955,1765 3025,1835 U3.8 ; v4(3685,1600) 3685,1235 v1@3700,1220
  Bottom Layer w10: P2.2@3970,1215 P2.2
  Bottom Layer w30: v1(2990,1610) 3470,1610 3520,1660 3625,1660 v4(3685,1600) ; v1(3705,1215) P2.2@3970,1215
OUT3: P3.2 U3.13 | length 612.5
  Top Layer w30: U3.13@3475,1835 v2(3545,1835)
  Bottom Layer w10: P3.2@3945,1690 P3.2
  Bottom Layer w30: v2(3545,1835) 3560,1850 3820,1850 P3.2
OUT4: P4.2 U3.18 | length 572.1
  Top Layer w30: U3.18 v4@3545,2085
  Bottom Layer w30: v4@3545,2085 3910,2085 P4.2 ; P4.2@4010,2140 P4.2@4010,2165
  other v4: 3540,2085
PA0: MC1.57 U3.9 | length 907.3
  Top Layer w10: MC1.57 v1(2334.8,1789.8) ; v1(3005,1725) 3005,1750 3040,1785 U3.9
  Bottom Layer w10: v1(2334.8,1789.8) 2419.61,1705 2985,1705 v1(3005,1725)
PA1: MC1.58 U3.2 | length 1171.5
  Top Layer w10: MC1.58 2325.39,1815.39 v1(2335,1825) ; v7(2685,1825) 2710,1850 2710,2160 v1(2725,2175) ; v1(3010,2175) 3015,2175 3055,2135 U3.2
  Bottom Layer w10: v1(2335,1825) v7(2685,1825) ; v1(2725,2175) v1(3010,2175)
PA2: MC1.59 U3.19 | length 2271.5
  Top Layer w10: MC1.59 2315.63,1840.98 2324.64,1850 2345.36,1850 2350.36,1845 2415,1845 2450,1810 2450,1570 2460,1560 v1(2475,1560) ; U3.19 3565,2135 3580,2120 3580,1955 3569,1944 3569,1897 3622,1844 3622,1642 v1(3580,1600)
  Bottom Layer w10: v1(2475,1560) 3540,1560 v1(3580,1600)
PA3: MC1.60 U3.12 | length 1762.4
  Top Layer w10: MC1.60 2274.08,1870 2440,1870 2475,1835 2475,1595 2486,1584 v1(2520,1584) ; U3.12 3520,1785 3530,1775 v1(3530,1610)
  Bottom Layer w10: v1@2520,1580 3500,1580 v1(3530,1610)
PB0: MC1.24 P14.5 | length 967
  Top Layer w10: P14.5@820,2315 875.47,2259.53 875.47,2103.53 v1(893,2086) ; v1@1350,2060 1350,1938.62 1347.24,1935.87 1347.24,1907.4 1355,1899.64 1355,1895 1357.84,1892.16 MC1.24
  Bottom Layer w10: v1(893,2086) 1325.4,2082.93 v1(1349,2059)
PB1: MC1.25 P14.6 | length 907.4
  Top Layer w10: P14.6@820,2215 815,2210 815,2082 v1(839,2058) ; v1(1079,2058) 1095,2042 v1(1095,1905) ; 1325,1870 1328.43,1866.57 MC1.25
  Bottom Layer w10: v1(839,2058) v1(1079,2058) ; 1090,1895 1095,1890 1140.36,1890 1150.36,1880 v1(1320,1880)
PB2: MC1.26 P14.8 | length 1015
  Top Layer w10: v1(720,2075) P14.8@720,2215 ; v1(1130,1865) v1@1130,2010 ; v1@1335.98,1840.98 MC1.26
  Bottom Layer w10: v1@719,2074 759,2034 1105,2034 v1(1129,2010) ; v1@1135,1860 1150,1860 1155,1855 1258.28,1855 1273.28,1840 v1(1330,1840)
PB3: MC1.27 P15.5 | length 711.9
  Top Layer w10: v1(805,1880) 805,1910 P15.5 ; v1(1355,1800) 1370.39,1815.39 MC1.27
  Bottom Layer w10: v1(805,1880) 815.47,1869.53 1038.44,1869.53 1072.97,1835 1250,1835 1285,1800 v1(1355,1800)
PB4: MC1.28 P15.6 | length 677.4
  Top Layer w10: P15.6 820,1785 v1(855,1750) ; v1(1360,1760) 1389.8,1789.8 MC1.28
  Bottom Layer w10: v1(855,1750) 1350,1750 v1@1360.2,1760.2
PB5: MC1.29 P15.8 | length 995.8
  Top Layer w10: v1(720,1665) P15.8 ; v1(1475,1650) 1502.94,1677.94 MC1.29
  Bottom Layer w10: v1(720,1665) 735,1650 v1(1475,1650)
PK0: MC1.8 P16.5 | length 825.9
  Top Layer w10: v1(815,2470) P16.5 ; v1(1363.39,2301.61) MC1.8
  Bottom Layer w10: v1(815,2470) 840,2445 1010,2445 1153.39,2301.61 v1(1363.39,2301.61)
PK1: MC1.7 P16.6 | length 884.8
  Top Layer w10: P16.6 859.54,2670.46 859.54,2596.56 850,2587.01 v1(850,2490) ; 1360,2340 1367.8,2332.2 1367.8,2327.2 MC1.7
  Bottom Layer w10: 845,2480 855,2470 1013.28,2470 1143.28,2340 v1(1350,2340)
PK2: MC1.6 P16.8 | length 747.5
  Top Layer w10: P16.8 930,2715 955,2690 955,2642.53 959.54,2637.99 959.54,2529.54 v1@955,2525 ; 1360,2380 1387.2,2352.8 MC1.6
  Bottom Layer w10: v1(960,2525) 985,2500 1060,2500 1170,2390 v1(1355,2390)
R\E\S\E\T\: C24.2 P8.1 R12.2 U4.4 | length 937.8
  Top Layer w30: R12.2 275,1235 v2(280,1235) 280,1100 275,1095 C24.2 225,835 365,695 P8.1
  Bottom Layer w30: v2@280,1240 U4.4
RESET: MC1.42
RXD0: MC1.89 U2.12 | length 1335
  Top Layer w10: MC1.89@2090,2557.52 2090,2585 2116,2611 v1(2203,2611) ; v1(2780,2435) 2783,2438 v1(2783,2563) ; v1(3120,2435) U2.12@3120,2520
  Bottom Layer w10: v1@2203,2610 2208,2605 2757,2605 2783,2579 v1(2783,2563) ; v1(2780,2435) 2805,2410 3095,2410 v1(3120,2435)
RXD1: MC1.91 U2.9 | length 1195
  Top Layer w10: MC1.91 v1(2040.34,2635.34) ; v1(2865,2505) v1(2865,2630) ; v1(2940,2480) 2940,2490 U2.9
  Bottom Layer w10: v1(2040.34,2635.34) 2065,2660 2835,2660 v1(2865,2630) ; v1(2865,2505) 2890,2480 v1(2940,2480)
TXD0: MC1.90 U2.11 | length 1308.9
  Top Layer w10: MC1.90@2066,2558.59 2066,2590 v1(2112,2636) ; v1(2815,2460) v1@2815,2610 ; v1(3080,2455) U2.11@3080,2520
  Bottom Layer w10: v1(2112,2636) 2784.69,2640 v1(2811,2614) ; v1(2815,2460) 2845,2430 3055,2430 v1(3080,2455)
TXD1: MC1.92 U2.10 | length 1369.1
  Top Layer w10: MC1.92 2014.75,2654.75 v1(2040,2680) ; v1(2865,2680) 2895,2650 2895,2480 v1(2920,2455) ; v1(3010,2455) 3030,2475 U2.10@3030,2520
  Bottom Layer w10: v1@2040,2679.75 2040.25,2680 v1(2865,2680) ; v1(2920,2455) v1(3010,2455)
pads on no net: MC1.1 MC1.2 MC1.3 MC1.4 MC1.5 MC1.9 MC1.10 MC1.11 MC1.12 MC1.15 MC1.16 MC1.17 MC1.18 MC1.19 MC1.20 MC1.21 MC1.22 MC1.30 MC1.31 MC1.32 MC1.49 MC1.53 MC1.54 MC1.55 MC1.56 MC1.61 MC1.62 MC1.63 MC1.64 MC1.67 MC1.68 MC1.69 MC1.70 MC1.71 MC1.72 MC1.73 MC1.74 MC1.75 MC1.76 MC1.77 MC1.78 MC1.79 MC1.80 MC1.81 MC1.82 MC1.87 MC1.88 MC1.93 MC1.94 MC1.95 MC1.96 MC1.98 MC1.99 MC1.100 MC1.101 MC1.102 MC1.103 MC1.104 MC1.105 MC1.108 MC1.109 MC1.110 MC1.111 MC1.112 P14.7 P14.9 P15.7 P15.9 P16.7 P16.9 U3.6 U3.15 U3.16 U3.17 U3.21 U4.1 U4.5
copper on no net: | length 16158.5
  Top Layer w10: 2.5,-2.5 5,-5 ; 4225,3992 4225,100 40,100 40,3993 4225,3993
  other v3: 3211.14,1841.89 3258.39,1841.89 3305.63,1841.89 3352.87,1841.89 3211.14,1889.13 3258.39,1889.13 3305.63,1889.13 3352.87,1889.13 3211.14,1936.38 3258.39,1936.38 3305.63,1936.38 3352.87,1936.38 3211.14,1983.62 3258.39,1983.62 3305.63,1983.62 3352.87,1983.62 3211.14,2030.87 3258.39,2030.87 3305.63,2030.87 3352.87,2030.87 3211.14,2078.11 3258.39,2078.11 3305.63,2078.11 3352.87,2078.11

## Silkscreen, mask and mechanical layers (free items; w line width, h text height)
Top Overlay:
  text "1" at 3914,3648 h60 r90
  text "+" at 386,3521 h60 r90
  text "2" at 3921,3421 h60 r90
  text "3" at 3921,3216 h60 r90
  text "1" at 3908,3015 h60 r90
  text "2" at 3919,2800 h60 r90
  text "3" at 3921,2596 h60 r90

## Text inside footprints (layer, text, board x,y; h text height)
MC1: Top Overlay "MC9S12xep100" at 1609,1853 h30
P14: Top Overlay "2" at 1105,2215 h30 r180; Top Overlay "1" at 1020,2405 h30 r180; Top Overlay "9" at 560,2330 h30 r180; Top Overlay "10" at 560,2230 h30 r180
P15: Top Overlay "2" at 1105,1805 h30 r180; Top Overlay "1" at 1060,2020 h30 r180; Top Overlay "9" at 560,1995 h30 r180; Top Overlay "10" at 560,1845 h30 r180
P16: Top Overlay "2" at 535,2740 h30; Top Overlay "1" at 535.01,2595 h30; Top Overlay "9" at 1010,2525 h30; Top Overlay "10" at 1080,2710 h30